# Altium PCB PCB1.PcbDoc (part 3 of 3)
Units mm, origin at the board's own origin, x right, y up, seen from the top; angles counter-clockwise.
Board outline 144.5 x 134 mm, 4 copper layers ([L1] Top, [L2] GND, [L3] POWER, [L4] BOTTOM), stack 1.584 mm thick; 275 components, 215 nets, 860 pads, 1046 vias.
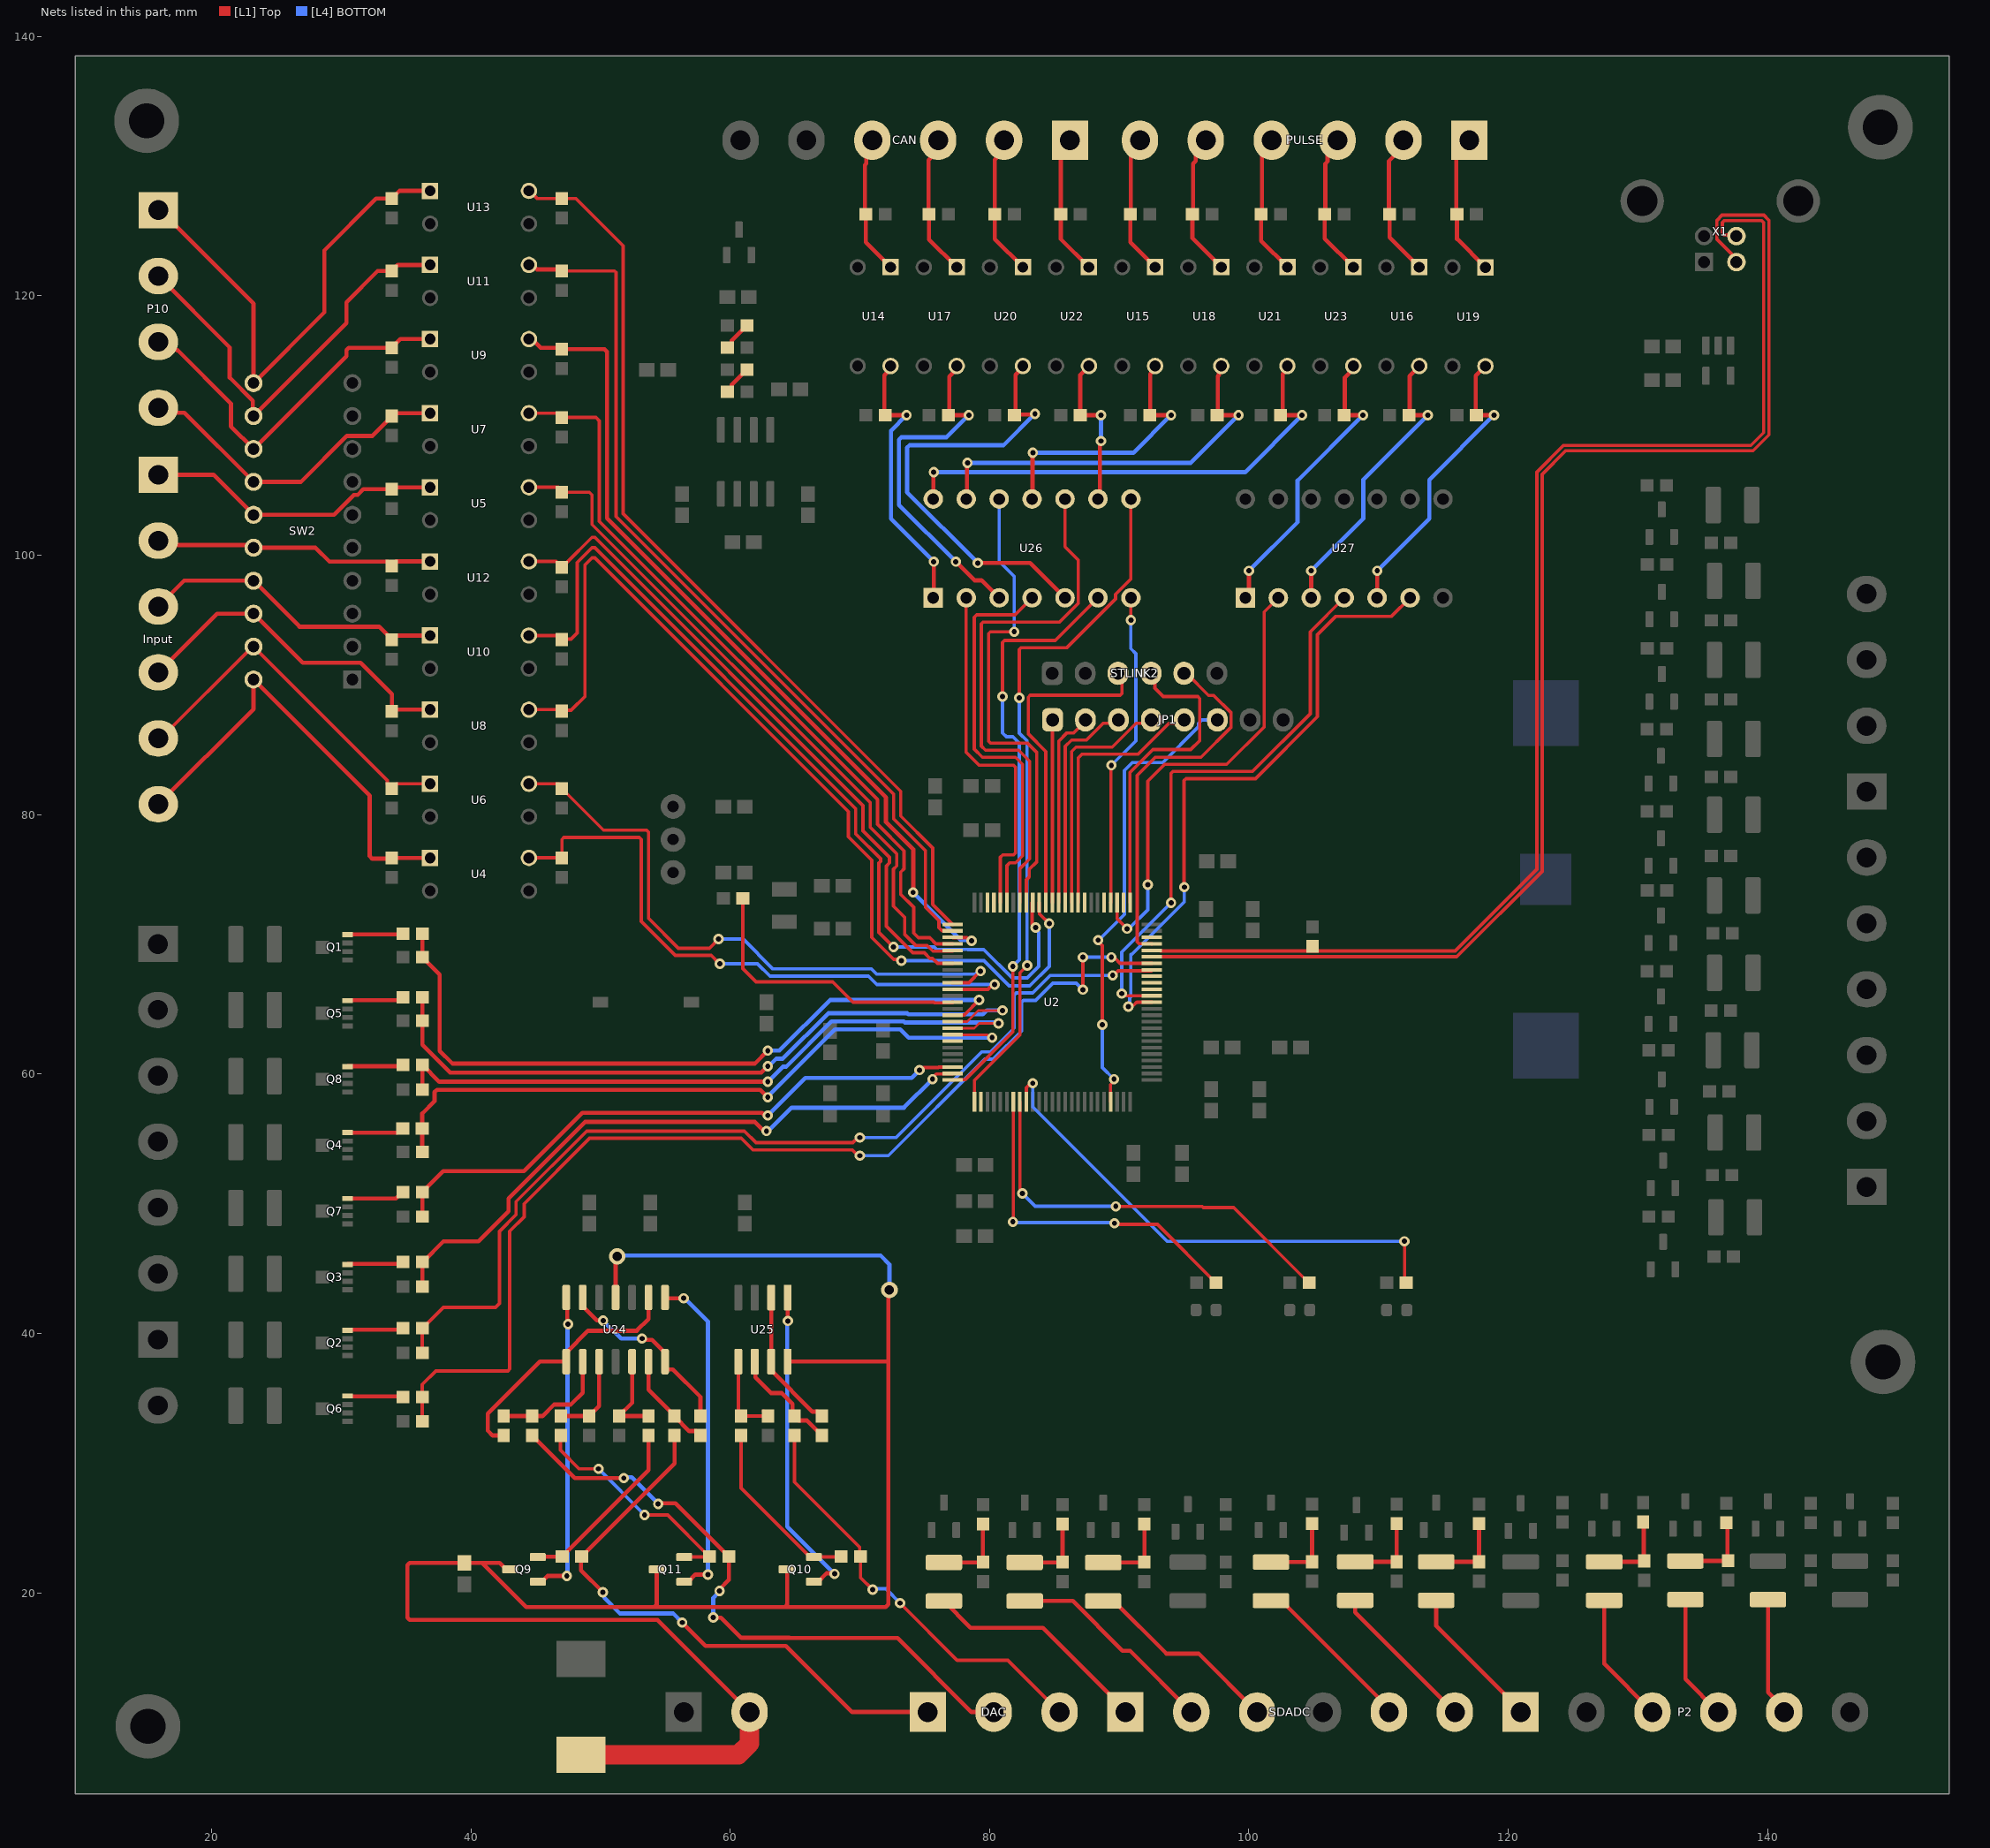
[diagram p5: the nets of this part, all layers, seen from the top]

## Via types
v1: diameter 0.8, hole 0.4, [L1] Top to [L4] BOTTOM, tented both sides, 816 vias
v2: diameter 0.8, hole 0.4, [L1] Top to [L4] BOTTOM, 223 vias
v3: diameter 1.27, hole 0.711, [L1] Top to [L4] BOTTOM, 5 vias
v4: diameter 0.8, hole 0.3, [L1] Top to [L4] BOTTOM, 2 vias

## Nets (pads, with @x,y where several pads share a name; then routed paths per layer and width w, separated by ;. In a path a pad name is that pad's centre, name@x,y a point inside that pad or via, vN(x,y) a via of type N, cw(c..) or ccw(c..) an arc to the next point about the centre after c; other vN are vias at no path point) (continued)
NetF22_2: F22.2 P2.5 | length 9.2
  [L1] Top w0.32: F22.2@140.029,19.469 140.029,12.33 141.28,11.079 P2.5@141.28,10.8
NetF23_1: F23.1 R90.1 R93.2 | length 6.2
  [L1] Top w0.32: F23.1@114.446,22.385 R93.2@117.736,22.385 117.742,22.391 117.742,25.324 R90.1@117.748,25.33
NetF23_2: F23.2 P2.1 | length 11.3
  [L1] Top w0.32: F23.2@114.446,19.415 114.446,17.441 120.96,10.927 P2.1@120.96,10.8
NetF24_1: F24.1 R91.1 R94.2 | length 6.1
  [L1] Top w0.32: F24.1@88.765,22.331 91.913,22.331 R94.2@91.94,22.358 R91.1@91.94,25.303
NetF24_2: F24.2 SDADC.3 | length 15.4
  [L1] Top w0.32: F24.2@88.765,19.361 89.58,19.361 93.64,15.301 96.139,15.301 SDADC.3@100.64,10.8
NetF25_1: F25.1 R95.1 R98.2 | length 6.3
  [L1] Top w0.32: F25.1@133.66,22.446 136.935,22.446 136.899,22.483 136.899,25.343 R95.1@136.835,25.406
NetF25_2: F25.2 P2.4 | length 9.7
  [L1] Top w0.32: F25.2@133.66,19.476 133.66,13.34 P2.4@136.2,10.8
NetF26_1: F26.1 R96.1 R99.2 | length 6.1
  [L1] Top w0.32: F26.1@108.2,22.385 R99.2@111.398,22.385 R96.1@111.398,25.33
NetF26_2: F26.2 SDADC.6 | length 11.8
  [L1] Top w0.32: F26.2@108.2,19.415 108.2,18.48 SDADC.6@115.88,10.8
NetF27_1: F27.1 R97.1 R100.2 | length 5.9
  [L1] Top w0.32: F27.1@82.715,22.331 85.609,22.331 R100.2@85.636,22.358 R97.1@85.636,25.303
NetF27_2: F27.2 SDADC.2 | length 16.4
  [L1] Top w0.32: F27.2@82.715,19.361 86.418,19.361 90.263,15.516 90.844,15.516 SDADC.2@95.56,10.8
NetF28_1: F28.1 R101.1 R104.2 | length 6.1
  [L1] Top w0.32: F28.1@127.4,22.385 130.435,22.385 130.45,22.4 130.45,25.4 R101.1@130.4,25.45
NetF28_2: F28.2 P2.3 | length 10.2
  [L1] Top w0.32: F28.2@127.4,19.415 127.4,14.52 P2.3@131.12,10.8
NetF29_1: F29.1 R102.1 R105.2 | length 6.1
  [L1] Top w0.32: F29.1@101.7,22.358 104.848,22.358 R105.2@104.875,22.385 R102.1@104.875,25.33
NetF29_2: F29.2 SDADC.5 | length 12.8
  [L1] Top w0.32: F29.2@101.7,19.388 102.515,19.388 110.8,11.103 SDADC.5@110.8,10.8
NetF30_1: F30.1 R103.1 R106.2 | length 6
  [L1] Top w0.32: F30.1@76.484,22.331 79.461,22.331 R106.2@79.488,22.358 R103.1@79.488,25.303
NetF30_2: F30.2 SDADC.1 | length 17.6
  [L1] Top w0.32: F30.2@76.484,19.361 78.545,17.3 84.107,17.3 90.48,10.927 SDADC.1@90.48,10.8
NetJP1_1: JP1.1 U2.88 | length 14.1
  [L1] Top w0.25: U2.88@84.848,73.224 JP1.1@84.848,87.288
  [L1] Top w0.32: JP1.1@84.848,87.288 JP1.1@84.86,87.3
NetJP1_2: JP1.2 U2.87 | length 15.3
  [L1] Top w0.25: U2.87@85.336,73.212 85.336,85.664 85.975,86.303 86.503,86.303 87.4,87.2 JP1.2@87.4,87.3
NetJP1_3: JP1.3 U2.86 | length 17
  [L1] Top w0.25: U2.86@85.836,73.212 85.836,85.264 86.325,85.753 87.473,85.753 88.765,87.045 89.685,87.045 JP1.3@89.94,87.3
NetJP1_4: JP1.4 U2.85 | length 18.8
  [L1] Top w0.25: U2.85@86.336,73.212 86.336,84.864 86.675,85.203 89.463,85.203 91.305,87.045 92.225,87.045 JP1.4@92.48,87.3
NetJP1_5: JP1.5 U2.84 | length 20.6
  [L1] Top w0.25: U2.84@86.836,73.212 86.836,84.364 87.125,84.653 91.453,84.653 93.845,87.045 94.765,87.045 JP1.5@95.02,87.3
NetJP1_6: JP1.6 U2.47 | length 36
  [L1] Top w0.25: v2(88.377,70.323) 88.377,70.224 88.7,69.901 v2(88.7,63.8) ; U2.47@89.336,57.852 89.336,59.187 89.6,59.451 v2(89.6,59.6)
  [L4] BOTTOM w0.25: v2(88.377,70.323) 88.423,70.323 90.4,72.3 90.4,83.4 91,84 93.34,84 96.095,86.755 96.095,87.01 96.385,87.3 JP1.6@97.56,87.3 ; v2(88.7,63.8) 88.7,60.5 v2(89.6,59.6)
NetP1_1: CAN.1 R79.1 U22.1 | length 11
  [L1] Top w0.32: CAN.1@86.2,132 85.5,131.3 85.5,126.305 R79.1@85.495,126.3 85.495,124.385 U22.1@87.67,122.21
NetP1_2: CAN.2 R75.1 U20.1 | length 11
  [L1] Top w0.32: CAN.2@81.12,132 81.12,131.204 80.4,130.484 80.4,126.315 R75.1@80.415,126.3 80.415,124.365 U20.1@82.57,122.21
NetP1_3: CAN.3 R69.1 U17.1 | length 11
  [L1] Top w0.32: CAN.3@76.04,132 76.04,131.204 75.3,130.464 75.3,126.335 R69.1@75.335,126.3 75.335,124.345 U17.1@77.47,122.21
NetP1_4: CAN.4 R63.1 U14.1 | length 10.8
  [L1] Top w0.32: CAN.4@70.96,132 70.487,131.527 70.487,130.187 70.4,130.1 70.4,126.35 R63.1@70.45,126.3 70.45,124.13 U14.1@72.37,122.21
NetP4_1: DAC.1 R109.1 R114.1 | length 44.3
  [L1] Top w0.32: R109.1@48.55,22.8 48.5,22.75 48.5,21.717 v2(50.18,20.038) ; R109.1@48.575,22.8 48.89,23.115 48.89,23.14 55.705,29.955 R114.1@55.705,32.119 ; v2(56.3,17.7) 58.1,15.9 64.3,15.9 69.4,10.8 DAC.1@75.24,10.8
  [L4] BOTTOM w0.32: 50.3,19.6 51.5,18.4 55.6,18.4 v2(56.3,17.7)
NetP4_2: DAC.2 R118.1 R121.1 | length 49.4
  [L1] Top w0.32: R121.1@44.735,32.119 44.735,32.094 45.05,31.779 45.075,31.779 48.018,28.836 v2(51.794,28.836) ; v2@54.4,26.9 55.775,26.9 59.875,22.8 R118.1@59.9,22.8 59.9,20.994 59.18,20.274 v2(59.18,20.138) ; v2(58.7,18.1) 58.718,18.082 59.286,18.082 60.848,16.52 64.557,16.52 64.577,16.5 72.899,16.5 78.599,10.8 79.083,10.8 DAC.2@80.395,12.113
  [L4] BOTTOM w0.32: v2@51.7,28.9 52.403,28.9 v2(54.449,26.854) ; v2(58.7,18.1) 58.7,19.6 v2@59,19.9
NetP4_3: DAC.3 R110.1 R116.1 | length 32.7
  [L1] Top w0.26: R116.1@64.965,32.119 64.965,28.535 69.987,23.513 69.987,22.863 R110.1@70.05,22.8 70.05,21.167 v2(70.98,20.238) ; v2(73.1,19.2) 77.504,14.796 81.404,14.796 DAC.3@85.4,10.8
  [L4] BOTTOM w0.26: v2@70.98,20.3 72,20.3 v2(73.1,19.2)
NetP7_1: PULSE.1 R73.1 U19.1 | length 11
  [L1] Top w0.32: PULSE.1@116.7,132 116,131.3 116,126.35 R73.1@116.05,126.3 116.05,124.39 U19.1@118.24,122.2
NetP7_2: PULSE.2 R67.1 U16.1 | length 11.1
  [L1] Top w0.32: PULSE.2@111.62,132 111.62,131.204 110.8,130.384 110.8,126.35 R67.1@110.85,126.3 110.85,124.5 U16.1@113.14,122.21
NetP7_3: PULSE.3 R81.1 U23.1 | length 11
  [L1] Top w0.32: PULSE.3@106.54,132 106.067,131.527 106.067,130.367 105.9,130.2 105.9,126.35 R81.1@105.85,126.3 105.85,124.41 U23.1@108.05,122.21
NetP7_4: PULSE.4 R77.1 U21.1 | length 10.8
  [L1] Top w0.32: PULSE.4@101.46,132 101,131.54 101,126.35 R77.1@100.95,126.3 100.95,124.23 U21.1@102.97,122.21
NetP7_5: PULSE.5 R71.1 U18.1 | length 11
  [L1] Top w0.32: PULSE.5@96.38,132 95.907,131.527 95.907,130.407 95.7,130.2 95.7,126.35 R71.1@95.65,126.3 95.65,124.43 U18.1@97.87,122.21
NetP7_6: PULSE.6 R65.1 U15.1 | length 10.8
  [L1] Top w0.32: PULSE.6@91.3,132 90.9,131.6 90.9,126.35 R65.1@90.85,126.3 90.85,124.13 U15.1@92.77,122.21
NetP10_1: P10.1 R25.1 SW2.11 U13.1 | length 39
  [L1] Top w0.32: P10.1@15.9,126.608 16.027,126.608 23.242,119.393 SW2.11@23.242,113.273 28.7,118.731 28.7,123.5 32.7,127.5 R25.1@33.915,127.5 33.915,127.525 34.487,128.097 U13.1@36.86,128.097
NetP10_2: P10.2 R21.1 SW2.12 U11.1 | length 33.2
  [L1] Top w0.32: P10.2@15.9,121.528 21.4,116.028 21.4,113.694 23.186,111.908 23.186,110.789 SW2.12@23.242,110.733 30.4,117.891 30.4,119.5 32.811,121.911 R21.1@33.915,121.911 33.915,121.936 34.361,122.382 U11.1@36.86,122.382
NetP10_3: P10.3 R17.1 SW2.13 U9.1 | length 29.2
  [L1] Top w0.32: P10.3@15.9,116.448 16.696,116.448 17.341,115.803 17.397,115.803 21.5,111.7 21.5,109.935 SW2.13@23.242,108.193 30.4,115.351 30.4,115.813 30.587,116 R17.1@33.915,116 33.915,116.025 34.557,116.667 U9.1@36.86,116.667
NetP10_4: P10.4 R13.1 SW2.14 U7.1 | length 25.5
  [L1] Top w0.32: P10.4@15.9,111.368 16.277,110.991 17.904,110.991 SW2.14@23.242,105.653 26.901,105.653 30.446,109.198 32.405,109.198 33.915,110.708 R13.1@33.915,110.733 34.134,110.952 U7.1@36.86,110.952
NetP11_1: Input.1 R9.1 SW2.15 U5.1 | length 23.1
  [L1] Top w0.32: Input.1@15.9,106.2 20.155,106.2 SW2.15@23.242,103.113 29.441,103.113 30.976,104.648 31.278,104.648 31.713,105.083 R9.1@33.915,105.083 34.069,105.237 U5.1@36.86,105.237
NetP11_2: Input.2 R23.1 SW2.16 U12.1 | length 21.9
  [L1] Top w0.32: Input.2@15.9,101.12 16.242,100.778 23.037,100.778 SW2.16@23.242,100.573 28.035,100.573 29.097,99.511 33.6,99.511 R23.1@33.915,99.196 ; R23.1@33.915,99.171 R23.1@33.915,99.196 ; U12.1@36.86,99.522 34.241,99.522 R23.1@33.915,99.196
NetP11_3: Input.3 R19.1 SW2.17 U10.1 | length 23.8
  [L1] Top w0.32: Input.3@15.9,96.04 17.893,98.033 SW2.17@23.242,98.033 26.787,94.488 32.938,94.488 33.915,93.511 R19.1@33.915,93.486 33.915,93.492 34.23,93.807 U10.1@36.86,93.807
NetP11_4: Input.4 R15.1 SW2.18 U8.1 | length 26.8
  [L1] Top w0.32: Input.4@15.9,90.96 20.433,95.493 SW2.18@23.242,95.493 27.035,91.7 31.5,91.7 33.915,89.285 R15.1@33.915,87.953 34.054,88.092 U8.1@36.86,88.092
NetP11_5: Input.5 R11.1 SW2.19 U6.1 | length 28.8
  [L1] Top w0.26: Input.5@15.9,85.88 16.098,85.88 23.171,92.953 SW2.19@23.242,92.953 33.57,82.625 33.57,82.348 R11.1@33.915,82.003 33.915,82.028 34.264,82.377 U6.1@36.86,82.377
NetP11_6: Input.6 R7.1 SW2.20 U4.1 | length 34.8
  [L1] Top w0.32: Input.6@15.9,80.8 23.242,88.142 SW2.20@23.242,90.413 32.2,81.455 32.2,76.787 32.387,76.6 33.853,76.6 R7.1@33.915,76.662 U4.1@36.86,76.662
NetQ1_4: Q1.4 R27.2 | length 4.3
  [L1] Top w0.32: Q1.4@30.489,70.737 30.52,70.769 34.729,70.769 R27.2@34.76,70.8
NetQ2_4: Q2.4 R28.2 | length 4.3
  [L1] Top w0.32: Q2.4@30.489,40.237 30.529,40.277 34.637,40.277 R28.2@34.76,40.4
NetQ3_4: Q3.4 R29.2 | length 4.3
  [L1] Top w0.32: Q3.4@30.489,45.317 30.529,45.357 34.617,45.357 R29.2@34.76,45.5
NetQ4_4: Q4.4 R33.2 | length 4.4
  [L1] Top w0.32: Q4.4@30.489,55.477 34.312,55.477 34.735,55.9 R33.2@34.76,55.9
NetQ5_4: Q5.4 R34.2 | length 4.4
  [L1] Top w0.32: Q5.4@30.489,65.657 30.529,65.697 34.557,65.697 R34.2@34.76,65.9
NetQ6_4: Q6.4 R35.2 | length 4.3
  [L1] Top w0.32: Q6.4@30.489,35.169 30.524,35.135 34.725,35.135 R35.2@34.76,35.1
NetQ7_4: Q7.4 R39.2 | length 4.5
  [L1] Top w0.32: Q7.4@30.489,50.397 34.232,50.397 34.735,50.9 R39.2@34.76,50.9
NetQ8_4: Q8.4 R40.2 | length 4.3
  [L1] Top w0.32: Q8.4@30.489,60.557 30.529,60.597 34.657,60.597 R40.2@34.76,60.7
NetQ9_1: Q9.1 U24.7 | length 24
  [L1] Top w0.32: Q9.1@45.16,20.85 45.475,20.85 45.925,21.3 v2(47.4,21.3) ; U24.7@47.355,42.769 47.427,42.697 47.427,40.773 v2(47.5,40.7)
  [L4] BOTTOM w0.32: v2(47.4,21.3) 47.45,21.35 47.45,40.65 v2(47.5,40.7)
NetQ9_2: Q9.2 R107.2 R109.2 | length 14
  [L1] Top w0.32: Q9.2@45.16,22.75 45.185,22.775 47.025,22.775 R109.2@47.05,22.8 47.075,22.8 47.39,23.115 47.39,23.14 53.705,29.455 R107.2@53.705,32.119
NetQ10_1: Q10.1 U25.1 | length 24.7
  [L1] Top w0.32: U25.1@64.435,42.759 64.442,42.752 64.442,40.961 v2(64.449,40.954) ; Q10.1@66.46,20.85 66.775,20.85 67.425,21.5 v2@68,21.5
  [L4] BOTTOM w0.32: v2@64.4,41 64.4,25.103 v2(68.049,21.454)
NetQ10_2: Q10.2 R108.2 R110.2 | length 14
  [L1] Top w0.26: R108.2@60.83,32.119 60.83,28.065 66.145,22.75 Q10.2@66.46,22.75 68.5,22.75 R110.2@68.55,22.8
NetQ11_1: Q11.1 U24.1 | length 25.6
  [L1] Top w0.32: U24.1@54.975,42.769 55.038,42.706 v2(56.411,42.706) ; Q11.1@56.46,20.85 56.775,20.85 57.325,21.4 v2@58.2,21.4
  [L4] BOTTOM w0.32: v2@56.4,42.8 58.283,40.917 v2(58.283,21.405)
NetQ11_2: Q11.2 R117.2 R118.2 | length 18.1
  [L1] Top w0.26: R117.2@46.935,32.119 46.9,32.084 46.9,31 48.346,29.554 v2(49.849,29.554) ; v2(53.4,26) 55.175,26 58.375,22.8 R118.2@58.4,22.8 58.35,22.75 Q11.2@56.46,22.75
  [L4] BOTTOM w0.26: v2@49.8,29.6 49.801,29.6 53.4,26.001 v2(53.4,26)
NetR2_1: R2.1 U2.13 | length 22.7
  [L1] Top w0.25: R2.1@60.974,73.538 60.974,68.126 62,67.1 67.9,67.1 69.468,65.532 75.705,65.532 75.755,65.482 77.156,65.482 U2.13@77.156,65.532
NetR3_1: R3.1 R4.2 | length 2.4
  [L1] Top w0.32: R4.2@59.789,116 59.814,116 60.129,116.315 60.129,116.565 61.264,117.7 R3.1@61.289,117.7
NetR5_1: R5.1 R6.2 | length 2.4
  [L1] Top w0.32: R6.2@59.789,112.6 59.814,112.6 60.129,112.915 60.129,113.165 61.264,114.3 R5.1@61.289,114.3
NetR8_1: R8.1 U2.11 U4.4 | length 49.1
  [L1] Top w0.26: U4.4@44.48,76.662 R8.1@46.91,76.662 ; R8.1@47.025,76.662 47.025,78.088 47.177,78.24 52.988,78.24 53.14,78.088 53.14,71.768 55.768,69.14 58.539,69.14 59.179,68.5 v2(59.2,68.5) ; U2.11@77.156,66.532 79.886,66.532 80.254,66.9 v2(80.4,66.9)
  [L4] BOTTOM w0.26: v2(59.2,68.5) 62.108,68.5 63.068,67.54 70.668,67.54 71.308,66.9 v2(80.4,66.9)
NetR10_1: R10.1 U2.5 U5.4 | length 53.1
  [L1] Top w0.25: R10.1@47.025,104.853 49.148,104.853 49.35,104.651 49.35,102.369 70.795,80.924 70.795,79.019 72.843,76.971 72.843,76.046 72.59,75.793 72.59,72.949 73.448,72.09 73.448,70.775 74.323,69.9 75.2,69.9 75.628,69.472 76.394,69.472 76.399,69.477 77.156,69.477 U2.5@77.156,69.532
  [L1] Top w0.26: U5.4@44.48,105.237 R10.1@46.756,105.237
NetR12_1: R12.1 U2.10 U6.4 | length 47.5
  [L1] Top w0.26: U6.4@44.48,82.377 R12.1@46.766,82.377 ; R12.1@47.025,82.003 50.228,78.8 53.548,78.8 53.7,78.648 53.7,72 56,69.7 58.4,69.7 v2(59.1,70.4) ; U2.10@77.156,67.032 78.408,67.032 v2(79.307,67.931)
  [L4] BOTTOM w0.26: v2(59.1,70.4) 61,70.4 63.3,68.1 70.9,68.1 71.3,67.7 78.9,67.7 v2@79.2,68
NetR14_1: R14.1 U2.4 U7.4 | length 58.4
  [L1] Top w0.25: 75.868,70.032 U2.4@77.156,70.032
  [L1] Top w0.26: U7.4@44.48,110.952 R14.1@46.806,110.952 ; R14.1@47.025,110.618 49.648,110.618 49.91,110.356 49.91,102.601 71.355,81.155 71.355,79.251 73.403,77.203 73.403,75.814 73.15,75.561 73.15,73.85 74.145,72.855 74.145,70.863 74.508,70.5 75.4,70.5 75.868,70.032
NetR16_1: R16.1 U2.90 U8.4 | length 75.1
  [L1] Top w0.26: U8.4@44.48,88.092 R16.1@47.025,88.092 ; R16.1@47.025,87.977 47.086,88.038 47.738,88.038 48.8,89.1 48.8,99.247 49.344,99.791 49.559,99.791 69.12,80.23 69.12,78.284 70.917,76.488 70.915,76.486 70.915,70.523 72.604,68.834 73.103,68.834 v2(73.207,68.731) ; U2.90@83.836,73.212 83.836,72.572 83.846,72.562 83.846,72.354 v2(84.6,71.6)
  [L4] BOTTOM w0.26: v2(73.207,68.731) 79.569,68.731 81.5,66.8 83.097,66.8 84.6,68.303 v2(84.6,71.6)
NetR18_1: R18.1 U2.3 U9.4 | length 65.4
  [L1] Top w0.25: U2.3@77.156,70.532 77.176,70.512 78.241,70.512 78.484,70.27 v2(78.613,70.27)
  [L1] Top w0.32: U9.4@44.48,116.667 44.716,116.667 45.383,116 R18.1@47.025,116 ; R18.1@47.025,115.885 50.313,115.885 50.5,115.698 50.5,102.845 72.015,81.33 72.015,79.426 74.115,77.326 74.115,74.015 v2(74.1,74)
  [L4] BOTTOM w0.32: v2(74.1,74) 77.784,70.316 v2@78.584,70.316
NetR20_1: R20.1 U2.91 U10.4 | length 69.2
  [L1] Top w0.26: U10.4@44.48,93.807 R20.1@46.831,93.807 ; R20.1@47.025,93.498 47.065,93.538 47.738,93.538 48.2,94 48.2,99.439 49.344,100.583 49.559,100.583 69.68,80.462 69.68,78.516 71.601,76.596 71.601,76.38 71.475,76.254 71.475,70.925 v2(72.6,69.8) ; U2.91@83.336,73.212 83.276,73.212 83.276,71.524 v2@83.5,71.3
  [L4] BOTTOM w0.26: v2(72.6,69.8) 75.715,69.8 75.915,69.6 78.321,69.6 78.332,69.59 79.549,69.59 81.738,67.4 82.905,67.4 83.8,68.295 83.8,70.91 83.559,71.151 v2(83.559,71.297)
NetR22_1: R22.1 U2.2 U11.4 | length 68.9
  [L1] Top w0.25: R22.1@47.025,121.923 51.077,121.923 51.2,121.8 51.2,102.973 72.6,81.573 72.6,79.669 74.768,77.501 75.069,77.2 75.069,72.842 76.113,71.798 ; 76.113,71.798 76.101,71.786 76.101,71.278 76.332,71.047 77.141,71.047 U2.2@77.156,71.032
  [L1] Top w0.32: U11.4@44.48,122.382 44.734,122.382 45.078,122.038 R22.1@47.025,122.038
NetR24_1: R24.1 U2.7 U12.4 | length 52.1
  [L1] Top w0.26: U12.4@44.48,99.522 46.584,99.522 R24.1@47.025,99.081 ; U2.7@77.156,68.532 75.986,68.532 75.601,68.917 75.398,68.917 74.97,69.345 74.093,69.345 72.035,71.403 72.035,76.023 72.288,76.276 72.288,76.7 70.24,78.748 70.24,80.694 49.559,101.375 49.344,101.375 47.395,99.426 47.37,99.426 R24.1@47.025,99.081 ; R24.1@47.025,99.081 R24.1@47.025,99.056 R24.1@47.025,99.081
NetR26_1: R26.1 U2.1 U13.4 | length 71.9
  [L1] Top w0.25: U13.4@44.48,128.097 44.524,128.097 45.109,127.512 R26.1@47.025,127.512 48.088,127.512 51.75,123.85 51.75,103.201 73.15,81.801 73.15,79.896 75.619,77.428 75.619,73.069 U2.1@77.156,71.532
NetR27_1: R27.1 R30.2 U2.15 | length 56.1
  [L1] Top w0.25: U2.15@77.176,64.552 78.052,64.552 v2(79.2,65.7)
  [L1] Top w0.32: R27.1@36.26,70.8 R30.2@36.26,69 37.6,67.66 37.6,61.777 38.577,60.8 61.9,60.8 v2(62.9,61.8)
  [L4] BOTTOM w0.32: v2(62.9,61.8) 63.8,61.8 67.7,65.7 v2(79.2,65.7)
NetR28_1: R28.1 R31.2 U2.68 | length 75.7
  [L1] Top w0.26: R31.2@36.26,38.5 R28.1@36.26,40.4 36.285,40.4 37.885,42 41.9,42 42.2,42.3 42.2,47.866 43.49,49.156 43.49,50.156 48.934,55.6 61.092,55.6 61.992,54.7 69.454,54.7 69.854,55.1 v2(70,55.1) ; v2(89.5,67.6) 89.57,67.6 89.922,67.952 92.496,67.952 92.516,67.972 U2.68@92.516,68.032
  [L4] BOTTOM w0.26: v2(70,55.1) 72.8,55.1 79.4,61.7 80.062,61.7 81.9,63.538 81.9,66.088 82.052,66.24 83.329,66.24 84.689,67.6 v2(89.5,67.6)
NetR29_1: R29.1 R32.2 U2.24 | length 49.9
  [L1] Top w0.25: v2@75.6,59.7 75.9,60 77.124,60 U2.24@77.156,60.032
  [L1] Top w0.32: R32.2@36.26,43.6 R29.1@36.26,45.5 36.285,45.5 37.885,47.1 40.6,47.1 42.9,49.4 42.9,50.4 48.8,56.3 61.92,56.3 62.7,55.52 v2@62.7,55.5
  [L4] BOTTOM w0.32: v2(62.8,55.6) 62.93,55.6 64.73,57.4 73.4,57.4 v2(75.6,59.6)
NetR33_1: R33.1 R36.2 U2.18 | length 53.9
  [L1] Top w0.2: U2.18@77.156,63.032 77.188,63 79.838,63 80.038,62.8 v2(80.2,62.8)
  [L1] Top w0.32: R36.2@36.26,54 36.25,54.01 R33.1@36.25,55.8 36.25,56.95 37.2,57.9 37.2,58.593 37.387,58.78 62.32,58.78 v2(62.9,58.2)
  [L4] BOTTOM w0.32: v2(62.9,58.2) 62.9,58.27 68.07,63.44 73.125,63.44 73.765,62.8 v2(80.2,62.8)
NetR34_1: R34.1 R37.2 U2.16 | length 55.6
  [L1] Top w0.2: U2.16@77.156,64.032 77.161,64.027 78.269,64.027 79.121,64.879 80.979,64.879 v2(81,64.9)
  [L1] Top w0.32: R34.1@36.26,65.9 R37.2@36.26,64.1 36.26,62.24 38.4,60.1 62.4,60.1 v2(62.9,60.6)
  [L4] BOTTOM w0.32: v2(62.9,60.6) 62.985,60.6 63.565,61.18 64.057,61.18 67.557,64.68 73.638,64.68 73.728,64.59 79.494,64.59 79.804,64.9 v2(81,64.9)
NetR35_1: R35.1 R38.2 U2.69 | length 83.7
  [L1] Top w0.26: R38.2@36.26,33.219 R35.1@36.26,35.1 36.26,36.06 37.3,37.1 42.848,37.1 43,37.252 43,47.874 44.113,48.987 44.113,49.987 49.166,55.04 60.86,55.04 61.76,54.14 69.414,54.14 69.854,53.7 v2(70,53.7) ; v2(87.2,66.5) v2(87.2,69) ; v2@89.7,68.9 90.068,68.532 U2.69@92.516,68.532
  [L4] BOTTOM w0.26: v2(70,53.7) 72.2,53.7 79.64,61.14 80.294,61.14 82.46,63.306 82.46,65.528 82.612,65.68 83.561,65.68 84.89,67.01 86.69,67.01 v2(87.2,66.5) ; v2(87.2,69) v2(89.4,69)
NetR39_1: R39.1 R41.2 U2.23 | length 46.7
  [L1] Top w0.2: 76.044,60.5 76.076,60.532
  [L1] Top w0.25: v2@74.7,60.3 74.9,60.5 76.044,60.5 ; 76.076,60.532 U2.23@77.156,60.532
  [L1] Top w0.32: R41.2@36.26,49 R39.1@36.26,50.9 37.86,52.5 44.1,52.5 48.6,57 62.447,57 v2@62.706,56.74
  [L4] BOTTOM w0.32: v2(62.9,56.8) 65.8,59.7 74,59.7 v2(74.6,60.3)
NetR40_1: R40.1 R42.2 U2.17 | length 52.6
  [L1] Top w0.2: U2.17@77.156,63.527 78.813,63.527 79.186,63.9 v2(80.7,63.9)
  [L1] Top w0.32: R42.2@36.26,58.8 36.26,60.56 R40.1@36.26,60.7 37.56,59.4 v2(62.9,59.4)
  [L4] BOTTOM w0.32: v2(62.9,59.4) 64.06,60.56 64.314,60.56 67.814,64.06 73.382,64.06 73.472,63.97 80.63,63.97 v2(80.7,63.9)
NetR64_1: R64.1 U14.4 U26.1 | length 21.6
  [L1] Top w0.32: U14.4@72.37,114.59 72.37,114.336 71.9,113.866 71.9,110.85 R64.1@71.95,110.8 v2(73.6,110.8) ; U26.1@75.662,96.714 75.7,96.752 v2(75.7,99.5)
  [L4] BOTTOM w0.32: v2(73.6,110.8) 72.4,109.6 72.4,102.8 v2(75.7,99.5)
NetR66_1: R66.1 U15.4 U26.11 | length 21.1
  [L1] Top w0.32: U26.11@83.282,104.334 83.312,104.364 83.312,107.87 v2(83.341,107.9) ; U15.4@92.77,114.59 92.77,114.336 92.4,113.966 92.4,110.85 R66.1@92.35,110.8 v2(94,110.8)
  [L4] BOTTOM w0.32: v2(83.341,107.9) 91.1,107.9 v2(94,110.8)
NetR68_1: R68.1 U16.4 U27.3 | length 23.4
  [L1] Top w0.32: v2(104.8,98.8) 104.805,98.795 104.805,96.719 U27.3@104.81,96.714 ; U16.4@113.14,114.59 113.14,114.54 112.4,113.8 112.4,110.85 R68.1@112.35,110.8 v2(113.8,110.8)
  [L4] BOTTOM w0.32: v2(104.8,98.8) 108.83,102.83 108.83,105.83 v2(113.8,110.8)
NetR70_1: R70.1 U17.4 U26.3 | length 27.5
  [L1] Top w0.32: v2(77.4,99.5) 78.835,98.065 79.391,98.065 U26.3@80.742,96.714 ; U17.4@77.47,114.59 77.47,114.336 76.9,113.766 76.9,110.865 R70.1@76.835,110.8 v2(78.4,110.8)
  [L4] BOTTOM w0.32: v2(77.4,99.5) 73.02,103.88 73.02,108.913 73.207,109.1 76.7,109.1 v2(78.4,110.8)
NetR72_1: R72.1 U18.4 U26.13 | length 30.8
  [L1] Top w0.32: U26.13@78.202,104.334 78.251,104.383 78.251,107.071 v2(78.3,107.12) ; U18.4@97.87,114.59 97.69,114.41 97.69,113.89 97.6,113.8 97.6,110.85 R72.1@97.55,110.8 v2(99.2,110.8)
  [L4] BOTTOM w0.32: v2(78.3,107.12) 95.52,107.12 v2(99.2,110.8)
NetR74_1: R74.1 U19.4 U27.5 | length 23.3
  [L1] Top w0.32: U27.5@109.89,96.714 109.895,96.719 109.895,98.795 v2(109.9,98.8) ; U19.4@118.24,114.58 117.5,113.84 117.5,110.85 R74.1@117.55,110.8 v2(118.9,110.8)
  [L4] BOTTOM w0.32: v2(109.9,98.8) 113.91,102.81 113.91,105.81 v2(118.9,110.8)
NetR76_1: R76.1 U20.4 U26.5 | length 35.6
  [L1] Top w0.32: v2(79.1,99.4) 83.135,99.4 U26.5@85.822,96.714 ; U20.4@82.57,114.59 82.57,114.47 82,113.9 82,110.885 R76.1@81.915,110.8 81.965,110.85 83.45,110.85 v2(83.5,110.9)
  [L4] BOTTOM w0.32: v2(79.1,99.4) 79.096,99.4 73.64,104.856 73.64,108.293 73.827,108.48 81.08,108.48 v2(83.5,110.9)
NetR78_1: R78.1 U21.4 U26.14 | length 38
  [L1] Top w0.32: U26.14@75.662,104.334 75.681,104.353 75.681,106.381 v2(75.7,106.4) ; U21.4@102.97,114.59 102.97,114.336 102.6,113.966 102.6,110.95 R78.1@102.45,110.8 v2(104.1,110.8)
  [L4] BOTTOM w0.32: v2(75.7,106.4) 99.7,106.4 v2(104.1,110.8)
NetR80_1: R80.1 U22.4 U26.9 | length 12.2
  [L1] Top w0.32: U22.4@87.67,114.59 87,113.92 87,110.805 R80.1@86.995,110.8 v2(88.6,110.8) ; U26.9@88.362,104.334 88.508,104.48 88.508,108.708 v2(88.6,108.8)
  [L4] BOTTOM w0.32: v2(88.6,108.8) v2(88.6,110.8)
NetR82_1: R82.1 U23.4 U27.1 | length 23.4
  [L1] Top w0.32: U27.1@99.73,96.714 100,96.984 v2(100,98.8) ; U23.4@108.05,114.59 108.05,114.35 107.4,113.7 107.4,110.85 R82.1@107.35,110.8 v2(108.8,110.8)
  [L4] BOTTOM w0.32: v2(100,98.8) 103.75,102.55 103.75,105.75 v2(108.8,110.8)
NetR107_1: R107.1 R111.2 U24.12 | length 6.9
  [L1] Top w0.32: U24.12@52.435,37.819 52.435,34.644 51.435,33.644 R111.2@51.435,33.619 R107.1@53.705,33.619
NetR108_1: R108.1 R112.2 U25.5 | length 6.9
  [L1] Top w0.26: U25.5@60.625,37.819 60.625,33.824 R108.1@60.83,33.619 R112.2@62.93,33.619 62.93,33.644 62.585,33.989 R112.2@62.56,33.989
NetR113_1: R113.1 R114.2 U24.13 | length 7.7
  [L1] Top w0.32: U24.13@53.705,37.819 53.705,35.644 55.705,33.644 R114.2@55.705,33.619 ; R114.2@55.705,33.594 56.84,32.459 57.39,32.459 57.705,32.144 R113.1@57.705,32.119
NetR113_2: R113.2 U24.6 U24.14 | length 14.7
  [L1] Top w0.32: U24.6@48.625,42.769 48.625,42.084 49.709,41 v2@50.1,41 ; v2(53.2,39.6) 53.292,39.508 53.971,39.508 54.975,38.504 54.975,37.367 55.115,37.227 55.568,37.227 57.705,35.089 R113.2@57.705,33.619
  [L4] BOTTOM w0.32: v2(50.205,40.978) 51.582,39.6 v2(53.2,39.6)
NetR115_1: R115.1 R116.2 U25.6 | length 8.8
  [L1] Top w0.32: U25.6@61.895,37.819 61.955,37.76 61.955,36.599 63.153,35.4 63.967,35.4 64.8,34.567 64.8,33.784 R116.2@64.965,33.619 ; R116.2@64.888,33.671 65.28,33.279 65.93,33.279 67.065,32.144 R115.1@67.065,32.119
NetR115_2: R115.2 U25.2 U25.7 | length 11
  [L1] Top w0.32: U25.2@63.165,42.759 U25.7@63.165,37.819 63.165,37.134 66.34,33.959 66.75,33.959 67.065,33.644 R115.2@67.065,33.619
NetR117_1: R117.1 R119.2 U24.10 | length 6.7
  [L1] Top w0.32: R117.1@46.935,33.619 R119.2@49.135,33.619 49.135,33.644 49.895,34.404 U24.10@49.895,37.819
NetR120_1: R120.1 R121.2 U24.9 | length 9.2
  [L1] Top w0.32: R120.1@42.535,33.619 R121.2@44.735,33.619 45.522,33.619 46.412,34.51 47.71,34.51 48.625,35.425 U24.9@48.625,37.819
NetR120_2: R120.2 U24.2 U24.8 | length 20.2
  [L1] Top w0.32: R120.2@42.535,32.119 41.681,32.119 41.3,32.5 41.3,33.798 45.322,37.819 U24.8@47.355,37.819 47.355,38.504 49.051,40.2 52.8,40.2 53.7,41.1 53.7,42.764 U24.2@53.705,42.769
NetR122_1: R122.1 U2.32 | length 26.8
  [L1] Top w0.25: v2(81.8,48.6) 81.836,48.636 U2.32@81.836,57.852 ; v2@89.7,48.4 92.95,48.4 97.45,43.9 R122.1@97.475,43.9
  [L4] BOTTOM w0.25: v2(81.8,48.6) 81.856,48.544 89.581,48.544 v2(89.637,48.488)
NetR123_1: R123.1 U2.33 | length 31.7
  [L1] Top w0.25: v2@82.336,51.036 U2.33@82.336,57.852 ; v2(89.737,49.788) 96.412,49.788 96.5,49.7 98.823,49.7 104.623,43.9 R123.1@104.648,43.9
  [L4] BOTTOM w0.25: v2(82.537,50.788) 83.525,49.8 v2@89.7,49.8
NetR124_1: R124.1 U2.34 | length 39.5
  [L1] Top w0.25: U2.34@82.836,57.852 82.836,58.936 v2@83.1,59.2 ; v2(112,47.1) 112,44.025 R124.1@112.125,43.9
  [L4] BOTTOM w0.25: v2(83.337,59.288) 83.337,57.463 93.7,47.1 v2(112,47.1)
NetSTLINK2_3: STLINK2.3 U2.89 | length 25.3
  [L1] Top w0.25: U2.89@84.336,73.212 84.336,84.867 83.003,86.2 83,86.2 83,89.054 83.146,89.2 90.064,89.2 90.21,89.346 STLINK2.3@90.21,90.9
NetSTLINK2_4: STLINK2.4 U2.76 | length 24.6
  [L1] Top w0.25: U2.76@90.836,73.212 90.836,83.258 92.589,85.011 95.511,85.011 96.2,85.7 96.2,88.954 96.054,89.1 93.4,89.1 92.75,89.75 STLINK2.4@92.75,90.9
NetSTLINK2_5: STLINK2.5 U2.72 | length 28.6
  [L1] Top w0.25: U2.72@92.516,70.032 92.501,70.047 91.517,70.047 91.386,70.178 91.386,83.03 92.778,84.422 96.302,84.422 98.635,86.755 98.635,87.845 97.287,89.193 96.897,89.193 95.29,90.8 STLINK2.5@95.29,90.9
NetU2_19: U2.19
NetU2_25: U2.25 U26.6 | length 46
  [L1] Top w0.25: U2.25@77.156,59.532 77.171,59.547 78.1,59.547 81.8,63.247 v2(81.8,68.3) ; v2(81,89.1) 81,93.279 81.146,93.425 85.073,93.425 U26.6@88.362,96.714
  [L4] BOTTOM w0.25: v2(81,89.1) 81,86.3 81.3,86 81.8,86 82.3,85.5 82.3,68.8 v2(81.8,68.3)
NetU2_26: U2.26 U26.8 | length 54
  [L1] Top w0.25: U2.26@78.836,57.852 78.836,59.505 82.35,63.019 82.35,67.807 v2(82.9,68.357) ; v2(82.3,89) 82.3,92.729 82.446,92.875 85.972,92.875 89.724,96.627 89.724,96.986 90.902,98.163 U26.8@90.902,104.334
  [L4] BOTTOM w0.25: v2(82.3,89) 82.3,86.278 82.884,85.694 82.884,68.373 v2(82.9,68.357)
NetU2_27: U2.27
NetU2_63: U2.63 U27.6 | length 48.2
  [L1] Top w0.25: v2(90.7,65.2) 90.805,65.305 91.134,65.305 91.361,65.532 U2.63@92.516,65.532 ; v2@95,74.4 95,82.626 95.146,82.772 100.51,82.772 105.286,87.547 105.286,93.872 106.707,95.293 111.009,95.293 U27.6@112.43,96.714
  [L4] BOTTOM w0.25: v2(90.7,65.2) 90.805,65.305 90.805,65.851 90.896,65.942 90.896,69.211 90.966,69.211 95.021,73.266 v2(95.021,74.407)
NetU2_64: U2.64 U27.4 | length 43.6
  [L1] Top w0.25: v2(90.2,66.2) 90.349,66.2 90.517,66.032 U2.64@92.516,66.032 ; v2(94,73.2) 94,83.176 94.146,83.322 100.282,83.322 104.736,87.775 104.736,94.099 U27.4@107.35,96.714
  [L4] BOTTOM w0.25: v2(90.2,66.2) 90.2,69.4 v2(94,73.2)
NetU2_65: U2.65
NetU2_66: U2.66
NetU2_67: U2.67
NetU2_73: U2.73
NetU2_77: U2.77
NetU2_78: U2.78 U27.2 | length 35.3
  [L1] Top w0.25: U2.78@89.836,73.212 89.836,71.964 v2(90.6,71.2) ; v2(92.2,74.6) 92.2,82.572 93.5,83.872 98.292,83.872 101.175,86.755 101.175,95.619 U27.2@102.27,96.714
  [L4] BOTTOM w0.25: v2@90.85,71.3 92.2,72.65 v2(92.2,74.6)
NetU2_79: U2.79 U26.7 | length 24.5
  [L1] Top w0.25: U2.79@89.336,73.212 89.351,73.227 89.351,83.751 v2(89.4,83.8) ; v2(90.9,95) 90.902,95.002 U26.7@90.902,96.714
  [L4] BOTTOM w0.25: v2(89.4,83.8) 91.285,85.685 91.285,92.41 90.9,92.795 v2(90.9,95)
NetU2_80: U2.80
NetU2_83: U2.83
NetU2_92: U2.92 U26.12 | length 37
  [L1] Top w0.25: v2(81.9,94.1) 80.068,94.1 79.922,93.954 79.922,85.666 80.068,85.52 82.906,85.52 83.65,84.776 83.65,76.363 83.052,75.765 83.052,75.18 82.836,74.964 U2.92@82.836,73.212
  [L4] BOTTOM w0.25: U26.12@80.742,104.334 80.742,99.527 81.9,98.369 v2(81.9,94.1)
NetU2_93: U2.93 U26.10 | length 41.4
  [L1] Top w0.25: U2.93@82.336,73.212 82.336,75.827 83.1,76.591 83.1,84.109 82.239,84.97 79.685,84.97 79.372,85.283 79.372,94.704 79.518,94.85 85.407,94.85 86.847,96.289 86.847,99.63 85.822,100.655 U26.10@85.822,104.334
NetU2_95: U2.95 U26.4 | length 30.9
  [L1] Top w0.25: U2.95@81.336,73.212 81.336,76.064 81.552,76.28 82.011,76.28 82.55,76.819 82.55,83.881 82.011,84.42 79.457,84.42 78.822,85.055 78.822,95.213 79.009,95.4 81.968,95.4 U26.4@83.282,96.714
NetU2_96: U2.96 U26.2 | length 27.6
  [L1] Top w0.25: U26.2@78.202,96.714 78.202,84.798 79.2,83.8 81.854,83.8 82,83.654 82,77.046 81.854,76.9 81.023,76.9 80.836,76.713 U2.96@80.836,73.212
NetU2_97: U2.97
NetU2_98: U2.98
USB_N: U2.70 X1.2 | length 106.9
  [L1] Top w0.26: U2.70@92.516,69.032 116.032,69.032 122.61,75.61 122.61,106.23 124.431,108.051 138.879,108.051 140.11,109.282 140.11,125.822 139.718,126.214 136.486,126.214 136.094,125.822 136.094,124.35 137.6,122.844 X1.2@137.6,122.6
USB_P: R1.2 U2.71 X1.3 | length 103.2
  [L1] Top w0.26: U2.71@92.516,69.532 93.156,69.532 93.201,69.487 115.907,69.487 122.2,75.78 122.2,106.4 124.261,108.461 138.709,108.461 139.7,109.452 139.7,125.652 139.548,125.804 136.656,125.804 136.504,125.652 136.504,124.85 136.656,124.698 137.502,124.698 X1.3@137.6,124.6
VDC: C33.1 D24.C PWR.2 Q9.3 Q10.3 Q11.3 U24.4 U25.8 | length 154.9
  [L1] Top w0.32: Q9.3@43.04,21.8 42.725,21.8 42.223,22.302 40.862,22.302 ; U24.4@51.165,42.769 51.171,42.775 v3@51.171,46 ; Q11.3@54.34,21.8 54.34,19.087 54.153,18.9 ; PWR.2@61.5,10.8 54.4,17.9 35.287,17.9 35.1,18.087 35.1,22.114 35.287,22.302 C33.1@39.5,22.302 40.862,22.302 ; Q10.3@64.34,21.8 64.4,21.74 64.4,19.087 64.213,18.9 ; U25.8@64.435,37.819 72.181,37.819 72.2,37.8 ; v3@72.2,43.2 72.2,37.8 ; 40.862,22.302 44.263,18.9 54.153,18.9 ; 54.153,18.9 64.213,18.9 ; 64.213,18.9 72,18.9 72.2,19.1 72.2,37.8
  [L1] Top w1.5: D24.C@48.5,7.5 60.621,7.5 61.5,8.379 PWR.2@61.5,10.8
  [L4] BOTTOM w0.32: v3@51.1,46.1 51.2,46 71.6,46 72.28,45.32 v3(72.28,43.338)
  other v3: 51.28,45.938
pads on no net: D2.2 D3.2 D4.2 D5.2 D6.2 D7.2 D8.2 D9.2 D10.2 D11.2 D12.2 D13.2 D14.2 D15.2 D16.2 D17.2 D18.2 D19.2 D20.2 D21.2 D22.2 D23.2 U1.4 U3.5 U3.8 U27.7 U27.8 U27.9 U27.10 U27.11 U27.12 U27.13 U27.14 X1.P1 X1.P2

## Polygon pours and split planes (outlines as drawn)
GND on [L4] BOTTOM "B.Cu-GND" (solid, remove dead copper, pour order 3): 9.5,4.5 154,4.5 154,138.5 9.5,138.5
+3,3V on [L3] POWER "In2.Cu-+3V3" (solid, remove dead copper, pour order 2): 9.5,4.5 154,4.5 154,138.5 9.5,138.5
GND on [L2] GND "In1.Cu-GND" (solid, remove dead copper, pour order 1): 9.5,4.5 154,4.5 154,138.5 9.5,138.5
GND on [L1] Top "F.Cu-GND" (solid, remove dead copper, pour order 0): 9.5,4.5 154,4.5 154,138.5 9.5,138.5

## Keep-outs
Keep-Out Layer:
  the board outline again, w0.254

## Silkscreen, mask and mechanical layers (free items; w line width, h text height)
Top Overlay:
  drawing of 84 lines, arcs and shapes, not listed
  text "STM32-PLC" at 12.254,24.254 h2.5
  text "Project: CAPSTONE PROJECT 1 / Student: NGUYEN GIA HUY  / ID: 2311179 / Last revision: 27/05/2026" at 12,17.1 h0.8
Mechanical 15:
  lines w0.254: 10,5 10,138 153.5,138 153.5,5 25.5,5 10,5